# Altium PCB E-04 Power Harness.PcbDoc
Units mil, origin at the board's own origin, x right, y up, seen from the top; angles counter-clockwise.
Board outline 405.61 x 1605.31 mil, 2 copper layers (Top Layer, Bottom Layer); 3 components, 3 nets, 10 pads, 0 vias.
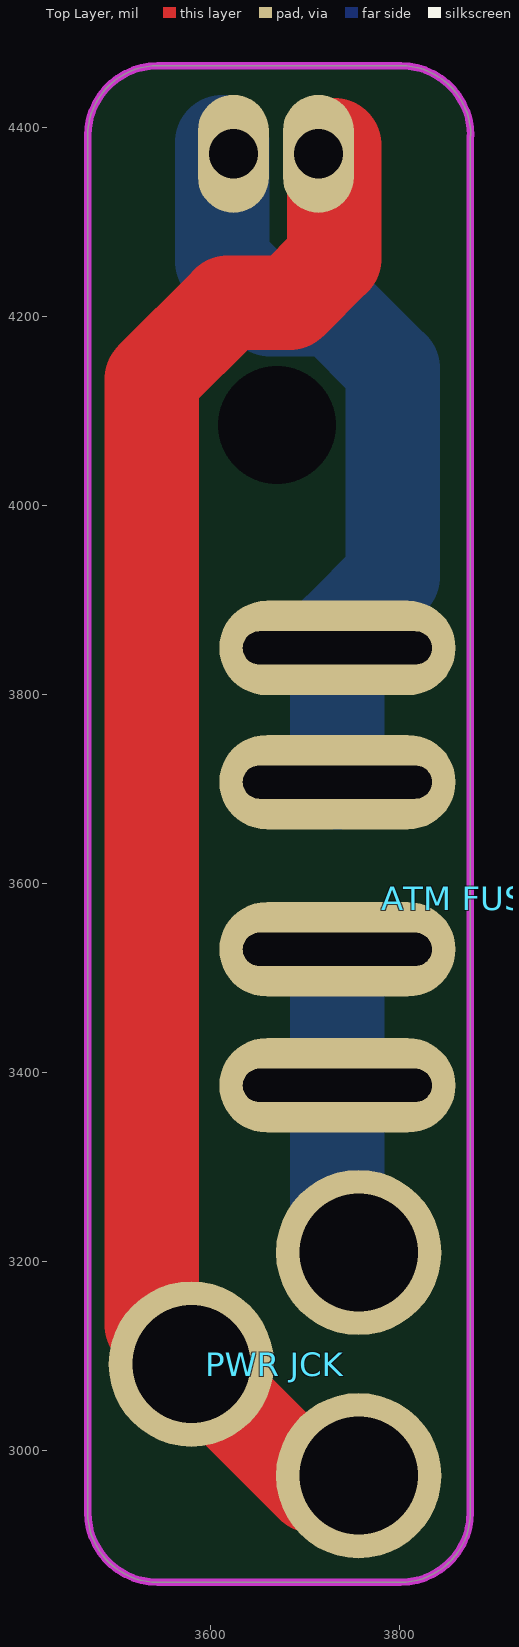
[diagram p0: Top Layer view]
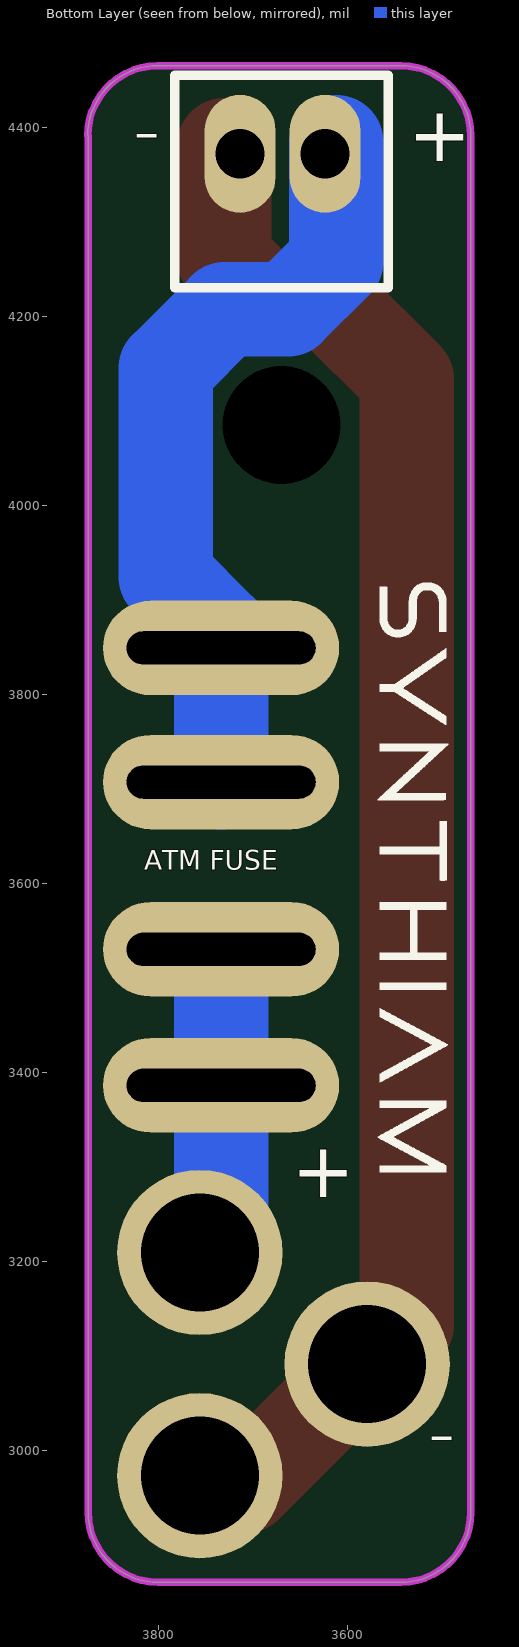
[diagram p1: Bottom Layer view, seen from below]

## Layer stack, top to bottom
Top Layer: signal copper 1.4
Dielectric: dielectric 12.6, FR-4, Dk 4.8
Bottom Layer: signal copper 1.4

## Board outline
3469.69,2934.31 ccw(c3544,2934.31) 3544,2860 3800.5,2860 ccw(c3800.5,2934.31) 3874.81,2934.31 3874.69,2934.31 3874.69,4391 3875.29,4391 ccw(c3800.98,4391) 3800.98,4465.31 3544.02,4465.31 ccw(c3544.02,4391) 3469.71,4391 3469.69,4391

## Design rules (kind name [scope] priority, off if disabled: settings)
Clearance [All] p1: gap=10
PolygonConnect [All] p1: connectstyle=Relief reliefconductorwidth=10 reliefentries=4 polygonreliefangle="90 Angle"
RoutingVias [All] p1: holewidth=28 width=50 viastyle="Through Hole" minholewidth=28 minwidth=50 maxholewidth=28 maxwidth=50
SilkscreenOverComponentPads [All] p1: minsilkscreentomaskgap=10
SolderMaskExpansion [All] p1: expansion=4
Width [All] p1: maxlimit=200 minlimit=10 preferedwidth=75 minimp=50.000000 maximp=50.000000 favimp=50.000000
27 further rules are at their usual default settings.

## Components (designator, comment, footprint, x,y, rotation, side; value= is the part's Value field where it differs from the comment)
"ATM FUSE" "Fuse 2" PIN-W2/E2.8 3868,3584 r270 top (schematic designator F1)
"PWR JCK" "PWR2.1" PWR2.1 3668,3091 r90 top
? "Comment" "MICRO DEANS" 3670,4375 r0 top

## Footprints (in the part's own frame and the unit in brackets; to place one, negate y for a bottom-side part, rotate by r counter-clockwise, add the part's x,y. Pads: shape width x height; smd on the part's side, far side on the other; paste and mask are expansions set on the pad)
"MICRO DEANS" [mil] "Connector; Header; 2 Position"
  oval 75x125 hole 52: 1(44,-3) 2(-46,-3)
PIN-W2/E2.8 [mil] "Fuse; 2 Leads"
PWR2.1 [mm]
  round 4.445 hole 3.175: 1(3,-2.25) 2(-3,-2.25) 3(0,2.25)

## Part data
"ATM FUSE": "Fuse"
"PWR JCK": library part PWR2.5, "Low Voltage Power Supply Connector"

## Free pads (board coordinates)
  oval 250x100 hole 35 slot 200 at 0 deg: 0(3734,3849) 1(3734,3707) 2(3734,3530) 3(3734,3386)
  round 0 hole 125: 1(3670,4085)

## Nets (pads, with @x,y where several pads share a name; then routed paths per layer and width w, separated by ;. In a path a pad name is that pad's centre, name@x,y a point inside that pad or via, vN(x,y) a via of type N, cw(c..) or ccw(c..) an arc to the next point about the centre after c; other vN are vias at no path point)
GND: "PWR JCK.2" "PWR JCK.3" ?.1 | length 1661.9
  Top Layer w75: 3708,2962 3762,2962
  Top Layer w100: 3708,2962 3537.5,3132.5 3537.5,4133.5 3618.12,4214.12 3683.62,4214.12 3730.5,4261 ?.1@3730.5,4381
V+: ?.2 pad.0 pad.1@3734,3707 | length 815.2
  Bottom Layer w100: ?.2@3612,4384 3612,4258.5 3663,4207.5 3730,4207.5 3792.5,4145 3792.5,3924.5 3734,3866 pad.1@3734,3707
Vin: "PWR JCK.1" pad.2 pad.3 | length 330.2
  Bottom Layer w100: pad.2 pad.3 3734,3231.69 3756.58,3209.11

## Keep-outs
Keep-Out Layer:
  lines w7.8: 3874.69,2934.31 3874.69,4391 ; 3874.81,2934.31 cw(c3800.5,2934.31) 3800.5,2860 3544,2860 cw(c3544,2934.31) 3469.69,2934.31 3469.69,4391 cw(c3544.02,4391) 3544.02,4465.31 3800.98,4465.31 cw(c3800.98,4391) 3875.29,4391

## Silkscreen, mask and mechanical layers (free items; w line width, h text height)
Bottom Overlay:
  drawing of 2260 lines, arcs and shapes, not listed
  text "-" at 3827,4352 h100
  text "+" at 3536,4345 h100
  text "+" at 3659,3248.5 h100
  text "-" at 3515,2973.5 h100
Top Solder:
  text ":)" at 3537.5,2956.5 h150 r270